# EAGLE board PressureSensorAdaptor (EAGLE 7.2.0)
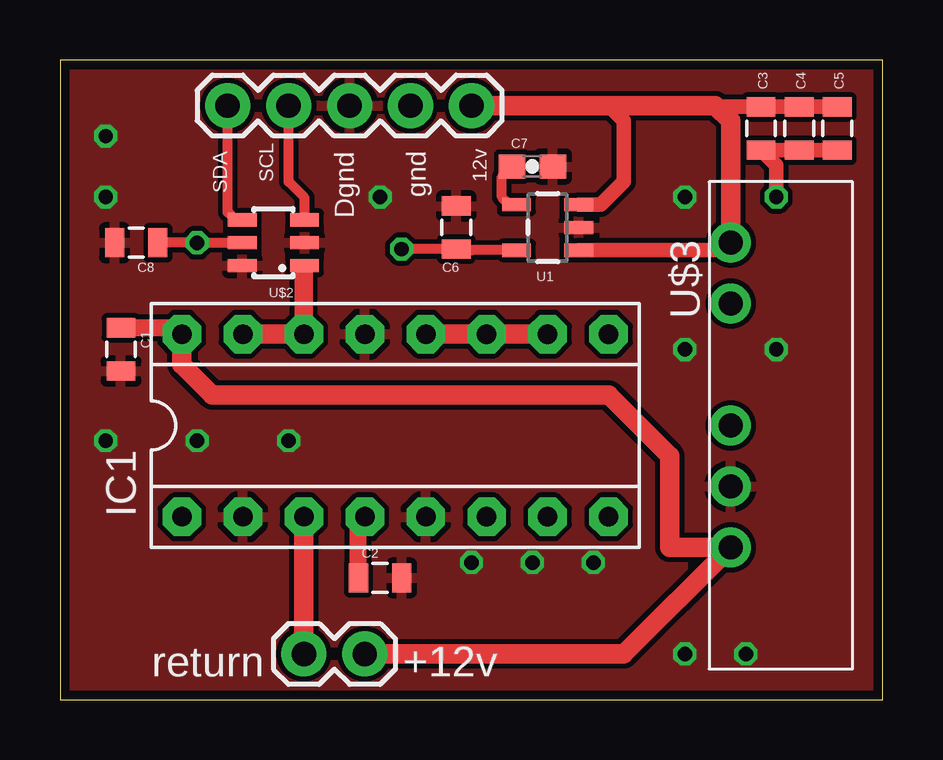
[diagram p0: board, top side]
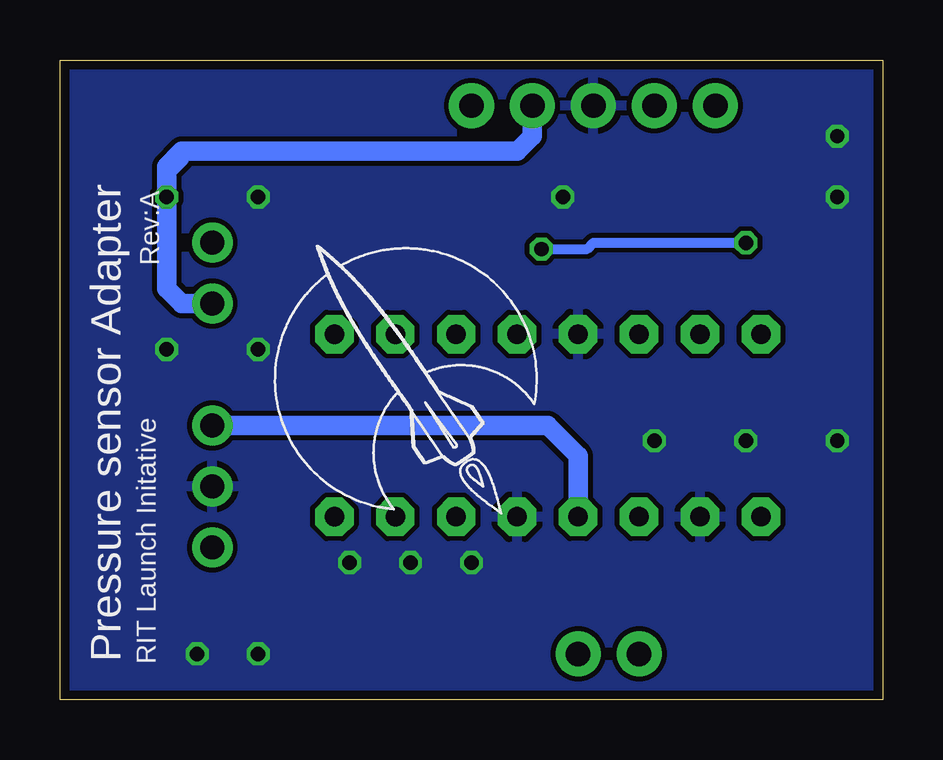
[diagram p1: board, bottom side, seen from below]

Size 34.29 x 26.67 mm. Coordinates in mm from the lower left corner, seen from the top.
Outline: 0,0 34.29,0 34.29,26.67 0,26.67 0,0
Copper layers (1*16): Top 0.0356mm / dielectric 1.5011mm / Bottom 0.0356mm
Design rules "LaenPCBOrder *": minimum track width 6mil, minimum drill 13mil, track to track 8mil, track to pad 8mil, pad to pad 8mil, via to via 8mil, smd to smd 6mil, copper to edge 15mil, drill to drill 6mil, minimum pad ring 7mil, minimum via ring 7mil, stop-mask expansion 3mil, vias tented up to drill 15mil, thermal gap 10mil

## Footprints (pad centres in the part's own frame; a part is rotated, then mirrored left to right if it is on the bottom)
0805 = smd 0.8 x 1.2: 1 -0.9,0; 2 0.9,0
0603-CAP = smd 1.1 x 1: 1 -0.85,0; 2 0.85,0
DIL16 = drill 0.813 pad 1.6 octagon: 1 -8.89,-3.81; 2 -6.35,-3.81; 3 -3.81,-3.81; 4 -1.27,-3.81; 5 1.27,-3.81; 6 3.81,-3.81; 7 6.35,-3.81; 8 8.89,-3.81; 9 8.89,3.81; 10 6.35,3.81; 11 3.81,3.81; 12 1.27,3.81; 13 -1.27,3.81; 14 -3.81,3.81; 15 -6.35,3.81; 16 -8.89,3.81
1X02 = drill 1.016 pad 1.88: 1 0,0; 2 2.54,0
1X05 = drill 1.016 pad 1.88: 1 0,0; 2 2.54,0; 3 5.08,0; 4 7.62,0; 5 10.16,0
SOT23-5 = smd 0.55 x 1.2: 1 -0.95,-1.3; 2 0,-1.3; 3 0.95,-1.3; 4 0.95,1.3; 5 -0.95,1.3
SOT23-6 = smd 1.2 x 0.55: 1 -1.3,0.95; 2 -1.3,0; 3 -1.3,-0.95; 4 1.3,-0.95; 5 1.3,0; 6 1.3,0.95
VASD1-S12-D12-SIP = drill 1 pad 1.676: P$1 0,0; P$2 2.54,0; P$4 7.62,0; P$5 10.16,0; P$6 12.7,0

## Placement (x,y rotation side)
C1  1.0uF  [0805]  2.54,14.61 270 top
C2  1.0uF  [0805]  13.34,5.08 0 top
C3  10uF  [0805]  29.21,23.81 270 top
C4  0.1uf  [0805]  30.8,23.81 270 top
C5  100pF  [0805]  32.38,23.81 270 top
C6  2.2uF  [0805]  16.51,19.68 90 top
C7  470pF  [0603-CAP]  19.68,22.23 0 top
C8  0.1uf  [0805]  3.17,19.05 180 top
FRAME1  FRAME-LEDGER  [CREATIVE_COMMONS]  -5.08,-3.81 0 top  (outside the outline)
IC1  RCV420P  [DIL16]  13.97,11.43 0 top
JP1  M02PTH  [1X02]  10.16,1.91 0 top
JP3  [1X05]  6.99,24.77 0 top
U1  [SOT23-5]  20.32,19.68 90 top
U$1  [RITLAUNCH_LOGO_SMALLB]  20.32,13.97 0 top
U$2  MCP3425  [SOT23-6]  8.89,19.05 180 top
U$3  VASD1-S12-D12-SIP  [VASD1-S12-D12-SIP]  27.94,19.05 270 top

## Library data of the parts
C1 C2 = SparkFun-Capacitors; PROD_ID: CAP-11625
C3 = SparkFun-Capacitors; DIGIKEY: 490-3886-1-ND
C4 C5 C8 = SparkFun-Capacitors
C6 = SparkFun-Capacitors; PROD_ID: CAP-11624
C7 = SparkFun-Capacitors; PROD_ID: CAP-07884
FRAME1 = SparkFun-Aesthetics; DESIGNER: Roy Cohen; VERSION: A
IC1 = burr-brown; MF: TEXAS INSTRUMENTS; MPN: RCV420JP; OC_FARNELL: 1212342; OC_NEWARK: 60K6765
JP1 JP3 = SparkFun-Connectors
U1 = SparkFun-PowerIC; PROD_ID: VREG-00823
U$1-U$3 = RitLaunchInitiative

## Nets
5V: C6.1 C8.1 U1.5 U$2.5
12V: C3.1 C4.1 C5.1 JP3.5 U1.1 U1.3 U$3.P$1
12V+: C1.1 IC1.16 JP1.2 U$3.P$6
12V-: C2.1 IC1.4 U$3.P$4
GND: C3.2 C4.2 C5.2 JP3.4 U$3.P$2
GND-ISO: C1.2 C2.2 C6.2 C7.2 C8.2 IC1.2 IC1.5 IC1.13 JP3.3 U1.2 U$2.2 U$2.6 U$3.P$5
N$1: IC1.10 IC1.11 IC1.12
N$2: IC1.3 JP1.1
N$11: C7.1 U1.4
SCL: JP3.2 U$2.3
SDA: JP3.1 U$2.4
VOUT: IC1.14 IC1.15 U$2.1

## Tracks (layer width: path | path; a pad name or v marks a point on that pad's centre or on a via)
5V  (via drill 0.6)
  Top 0.406: U1.5 17.2,18.73 C6.1 v14.23,18.79 | U$2.5 v5.71,19.05 C8.1
  Bottom 0.406: v14.23,18.79 12.33,18.79 12.06,19.05 v5.71,19.05
12V
  Top 0.61: U1.1 27.62,18.73 U$3.P$1 | U1.3 22.54,20.64 23.5,21.59 23.5,24.13 22.86,24.77 | 27.3,24.77 27.36,24.71 C3.1 C4.1 C5.1
  Top 0.813: JP3.5 22.86,24.77 27.3,24.77 27.94,24.13 U$3.P$1
12V+
  Top 0.711: C1.1 4.82,15.51
  Top 0.813: JP1.2 23.5,1.91 U$3.P$6 25.4,6.35 25.4,10.16 22.86,12.7 6.35,12.7 5.08,13.97 IC1.16 4.82,15.51
12V-
  Top 0.711: C2.1 12.44,7.36
  Top 0.813: 12.44,7.36 IC1.4
  Bottom 0.813: U$3.P$4 13.97,11.43 12.7,10.16 IC1.4
GND  (via drill 0.6)
  Top 0.61: C5.2 C4.2 C3.2 29.84,22.28 v29.84,20.95
  Bottom 0.61: 29.21,22.86 29.21,22.54 29.84,21.91
  Bottom 0.813: JP3.4 14.61,23.5 15.24,22.86 29.21,22.86 29.84,22.23 29.84,21.91 v29.84,20.95 29.84,17.14 29.21,16.51 U$3.P$2
GND-ISO  (via drill 0.6)
  other vias: 26.04,20.95 22.23,5.71 19.68,5.71 17.14,5.71 1.91,23.5 1.91,20.95 28.57,1.91 26.04,14.61 13.34,20.95 1.91,10.79 5.71,10.79 9.53,10.79 26.04,1.91 29.84,14.61
  pour Top: 0,33.02 40.64,33.02 40.64,0 0,0
  pour Bottom: 0,36.83 40.64,35.56 40.64,0 0,0
N$1
  Top 0.813: IC1.12 IC1.11 IC1.10
N$2
  Top 0.813: JP1.1 IC1.3
N$11
  Top 0.406: U1.4 18.73,20.64 18.41,20.95 18.41,21.8 C7.1
SCL
  Top 0.406: U$2.3 10.19,20.93 9.53,21.59 JP3.2
SDA
  Top 0.406: U$2.4 7.3,20 6.99,20.32 JP3.1
VOUT
  Top 0.406: U$2.1 10.19,15.27 IC1.14
  Top 0.762: IC1.14 10.16,17.78
  Top 0.813: IC1.14 IC1.15

## Text on the board
tPlace: SDA | Dgnd | SCL | 12v | gnd | return | +12v
bPlace: Rev:A | RIT Launch Initative | Pressure sensor Adapter